# Altium PCB PCB_dense_experiment.PcbDoc
Units mil, origin at the board's own origin, x right, y up, seen from the top; angles counter-clockwise.
Board outline 4040 x 2825 mil, 2 copper layers (Top Layer, Bottom Layer); 68 components, 54 nets, 243 pads, 108 vias.
Unrouted connection lines stored in the file: 1.
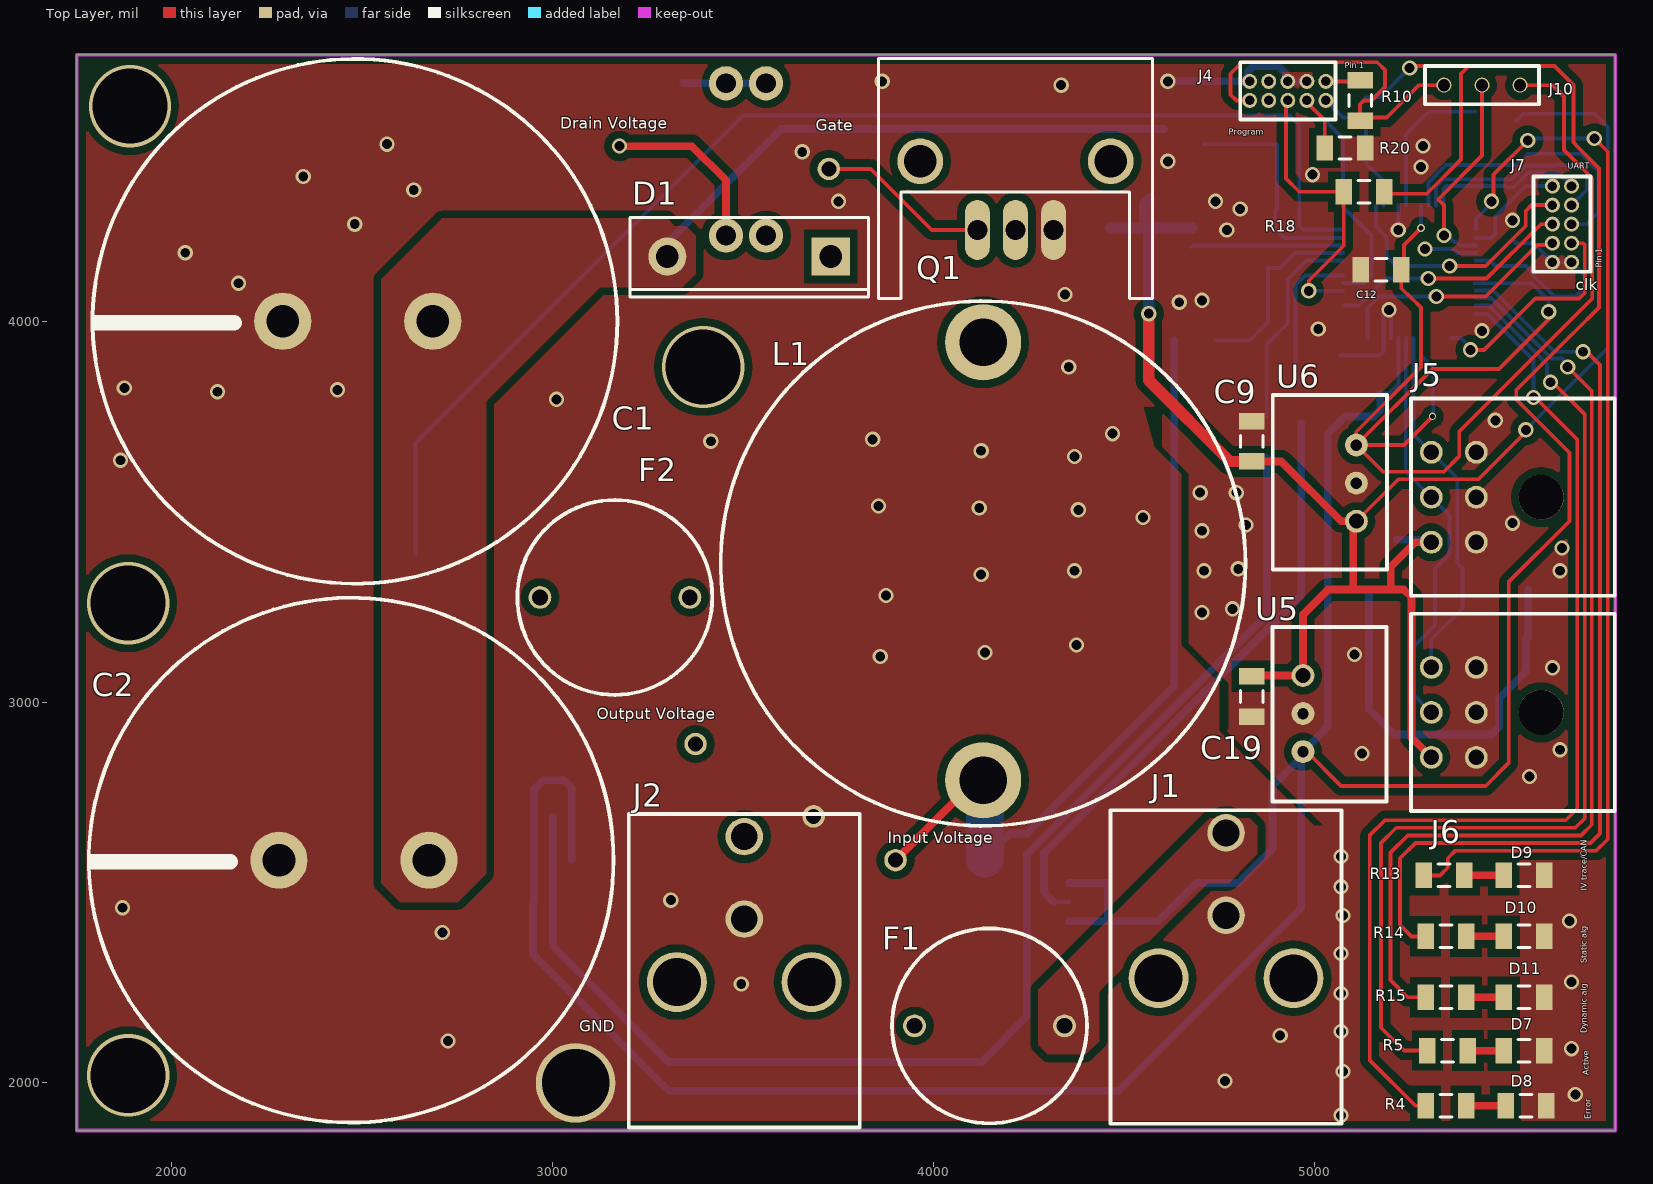
[diagram p0: Top Layer view]
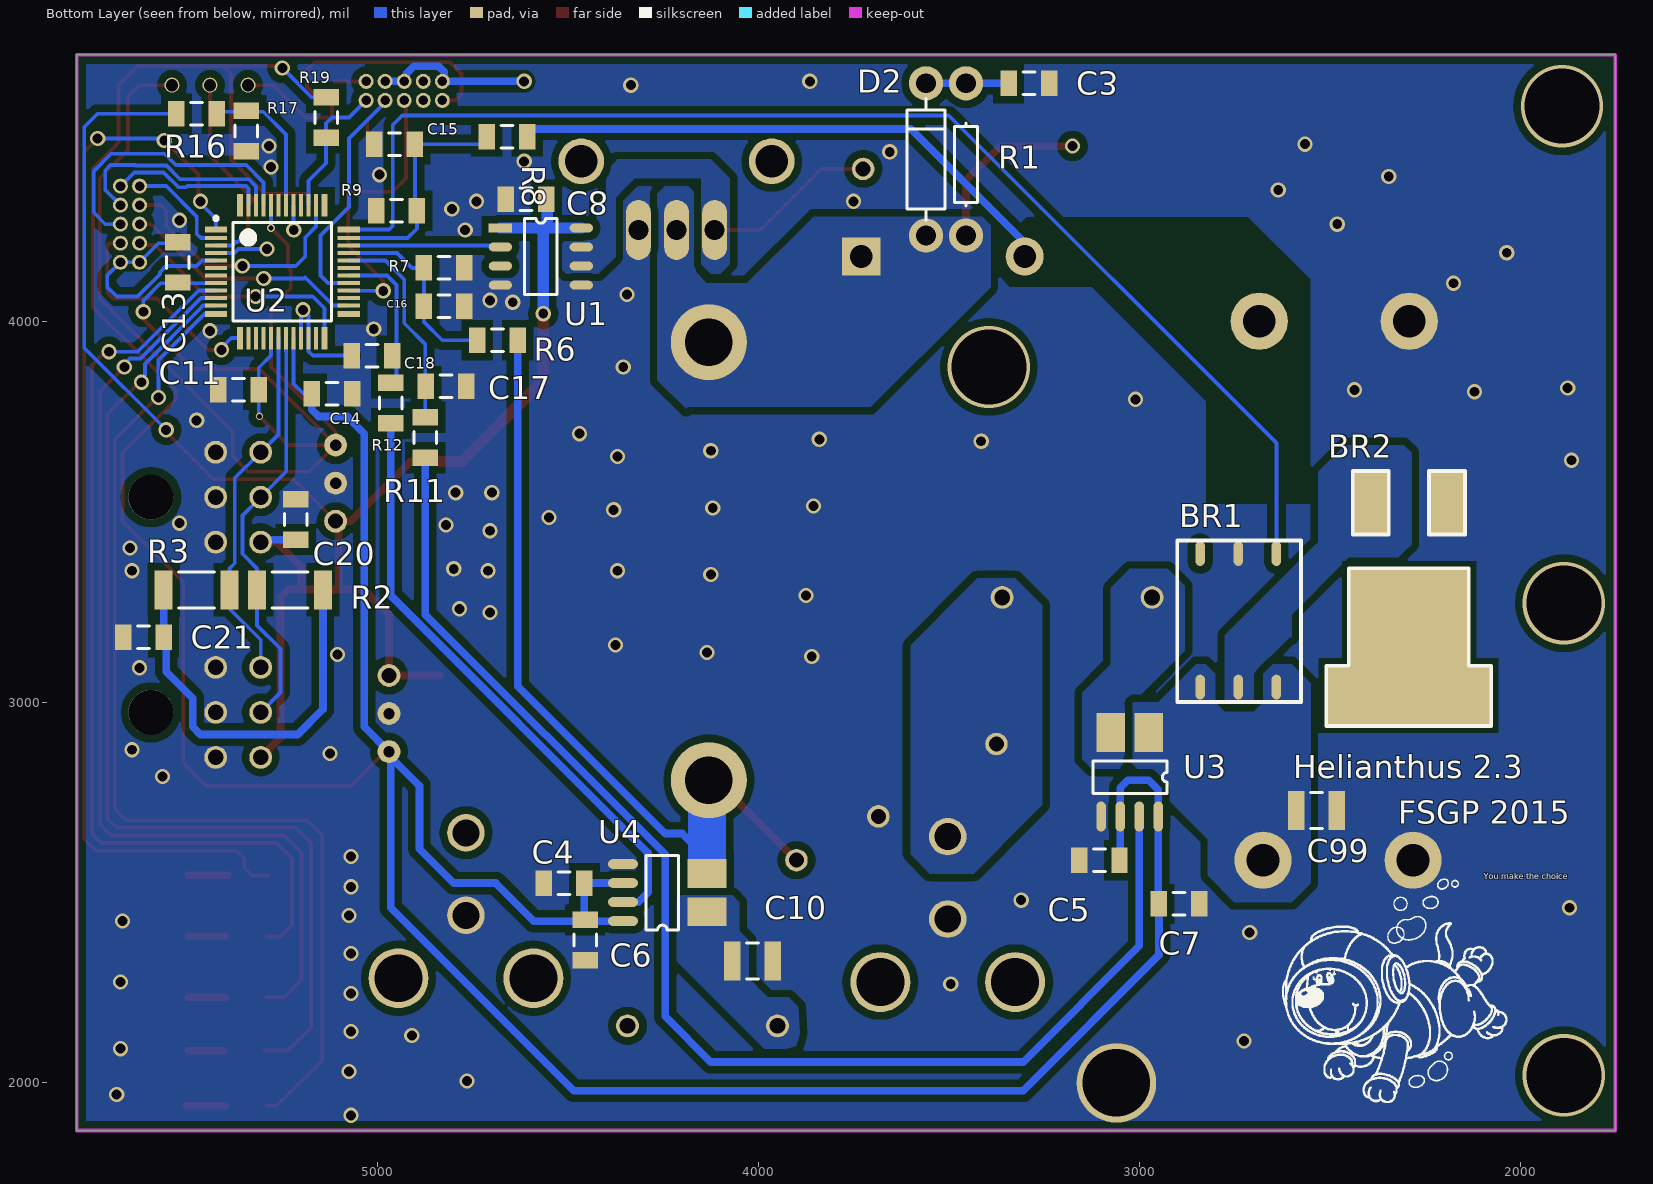
[diagram p1: Bottom Layer view, seen from below]

## Layer stack, top to bottom
Top Solder: solder mask 0.4, Solder Resist, Dk 3.5
Top Layer: signal copper 1.4
Dielectric 1: dielectric 12.6, FR-4, Dk 4.8
Bottom Layer: signal copper 1.4
Bottom Solder: solder mask 0.4, Solder Resist, Dk 3.5

## Board outline
1750,1875 1750,4700 5790,4700 5790,1875

## Design rules (kind name [scope] priority, off if disabled: settings)
Clearance "Polygon Clearance" [InPolygon] p1: gap=20
Clearance "All Clearance" [All] p2: gap=8
ComponentClearance "LPC11C24 clearance excuse" [InComponentClass('Microcontroller') vs InComponentClass('Microcontroller')] p1: gap=5 collisioncheckmode=3 verticalgap=10 showdistances=FALSE
DiffPairsRouting [All] p1: maxlimit=10 minlimit=10 mostfreqgap=10 toplayer_minwidth=10 toplayer_maxwidth=15 toplayer_prefwidth=15 bottomlayer_minwidth=10 bottomlayer_maxwidth=15 bottomlayer_prefwidth=15 maxuncoupledlength=500
PlaneConnect [All] p1: planeconnectstyle=Direct reliefexpansion=0 reliefentries=4 reliefconductorwidth=10 reliefairgap=0
PolygonConnect [All] p1: connectstyle=Direct reliefconductorwidth=10 reliefentries=4 polygonreliefangle="90 Angle" airgapwidth=0
RoutingVias [All] p1: holewidth=28 width=50 viastyle="Through Hole" minholewidth=11.81 minwidth=50 maxholewidth=28 maxwidth=50
SolderMaskExpansion [All] p1: expansion=4
UnpouredPolygon [All] p1: allowunpoured=FALSE
Width [All] p1: maxlimit=150 minlimit=4 preferedwidth=10 minimp=50.000000 maximp=50.000000 favimp=50.000000
26 further rules are at their usual default settings.

## Classes and differential pairs
component class Microcontroller: C11 C12 C13 C14 C15 C16 C17 C18 C21 D7 D8 D9 D10 D11 J4 J7 J10 R2 R3 R4 R5 R6 R7 R8 R9 R10 R11 R12 R13 R14 R15 R16 R17 R18 R19 R20 U2
component class System: BR1 BR2 C1 C2 C3 C4 C5 C6 C7 C8 C9 C10 C19 C20 C99 D1 D2 F1 F2 J1 J2 J5 J6 L1 Q1 R1 U1 U3 U4 U5 U6
differential pair CAN: +CAN_P -CAN_N

## Components (designator, comment, footprint, x,y, rotation, side; value= is the part's Value field where it differs from the comment)
BR1 "Bleeder Relay: CLA343-ND, Normally closed" "Bleeder Relay: CLA343-ND" 2835,3390 r270 bottom
BR2 "PWR263S-20-1001F-ND, 1K  20W" PWR263S-20-1001F-ND 2345,3440 r0 bottom
C1 "Cap 1000uF, 200V rated" LargeCap 2685,4000 r90 top
C2 "Cap 1000uF" LargeCap 2675,2585 r90 top
C3 "Cap Semi" C1206 3290,4625 r180 bottom
C4 "Cap Semi" C1206 4510,2525 r0 bottom
C5 "Cap Semi" C1206 3105,2585 r0 bottom
C6 "Cap Semi" C1206 4455,2375 r270 bottom
C7 "Cap Semi" C1206 2895,2470 r180 bottom
C8 "Cap Semi" C1206 4610,4320 r0 bottom
C9 "Cap Semi" C1206 4835,3685 r270 top
C10 "Cap Semi" C1210 4015,2320 r180 bottom
C11 "Cap Semi" C1206 5365,3820 r0 bottom
C12 "Cap Semi" C1206 5175,4135 r0 top
C13 "Cap Semi" C1206 5525,4155 r270 bottom
C14 "Cap Semi" C1206 5120,3810 r0 bottom
C15 "Cap Semi" C1206 4955,4465 r180 bottom
C16 "Cap Semi" C1206 4825,4040 r180 bottom
C17 "Cap Semi" C1206 4820,3830 r180 bottom
C18 "Cap Semi" C1206 5015,3910 r0 bottom
C19 "Cap Semi" C1206 4835,3015 r90 top
C20 "Cap Semi" C1206 5215,3480 r270 bottom
C21 "Cap Semi" C1206 5615,3170 r0 bottom
C99 "Cap Semi" C1210 2535,2715 r0 bottom
D1 "PowerDiode, 200V reverse" PowerDiode 3730,4170 r270 top
D2 "Diode 1N4003, 200V Rated" "Diode RDC" 3560,4225 r90 bottom
D7 "Green LED" C1206 5550,2085 r0 top
D8 "Red LED" C1206 5555,1940 r0 top
D9 "Yellow LED" C1206 5550,2545 r0 top
D10 "Blue LED" C1206 5550,2385 r0 top
D11 "Orange LED" C1206 5550,2225 r0 top
F1 "Fuse (Rating TBD)" Fuseholder 3950,2150 r180 top
F2 "Fuse (Rating TBD)" Fuseholder 3360,3275 r0 top
J1 "2 circuit MOLEX Receptacle, 9A rated" "2 circuit MOLEX Receptacle" 4945,2275 r0 top
J2 "2 circuit MOLEX Receptacle, 9A Rated" "2 circuit MOLEX Receptacle" 3680,2265 r0 top
J4 "10 pin SWD" "10 Pin JTAG/SWD" 5030,4630 r180 top
J5 "CAN 6 pin connector" "CAN 6 pin connector" 5425,3420 r180 top
J6 "CAN 6 pin connector" "CAN 6 pin connector" 5425,2855 r180 top
J7 "10 pin UART" "10 Pin JTAG/SWD" 5675,4155 r90 top
J10 "3-Pin Program Toggle" "3-Pin Program Toggle" 5290,4670 r0 top
L1 "1200 uH, 14.4 A rated" "Large Inductor" 4130,3945 r270 top
Q1 "FetWithHeatSink" FetWithHeatSink 4315,4240 r270 top
R1 "Res2" "RES RDC" 3455,4225 r270 bottom
R2 "Res3" 12Z-2010 5230,3295 r180 bottom
R3 "Res3" 12Z-2010 5475,3295 r180 bottom
R4 "Res3" C1206 5345,1940 r0 top
R5 "Res3" C1206 5350,2085 r0 top
R6 "Res3" C1206 4685,3950 r0 bottom
R7 "Res3" C1206 4825,4140 r180 bottom
R8 "Res3" C1206 4660,4485 r0 bottom
R9 "Res3" C1206 4950,4290 r180 bottom
R10 "Res3" C1206 5120,4580 r270 top
R11 "Res3" C1206 4875,3695 r90 bottom
R12 "Res3" C1206 4965,3785 r90 bottom
R13 "Res3" C1206 5340,2545 r0 top
R14 "Res3" C1206 5345,2385 r0 top
R15 "Res3" C1206 5345,2225 r0 top
R16 "Res3" C1206 5475,4545 r180 bottom
R17 "Res3" C1206 5345,4500 r90 bottom
R18 "Res3" C1206 5130,4340 r180 top
R19 "Res3" C1206 5135,4535 r270 bottom
R20 "Res3" C1206 5080,4455 r0 top
U1 "FET driver" "FET Driver" 4465,4245 r0 bottom
U2 "LPC11C24FBD48/301" SOT313-2_V 5250,4130 r180 bottom
U3 "Current sensor" "Current sensor" 2975,2920 r0 bottom
U4 "Current sensor, 20A max, 185mV/A" "Current sensor" 4135,2450 r90 bottom
U5 "12 to 5 converter, 0.5A max" "12 to 5 converter" 4970,3070 r270 top
U6 "12 to 3.3 converter, 0.5A max" "12 to 5 converter" 5110,3475 r90 top

## Footprints (in the part's own frame and the unit in brackets; to place one, negate y for a bottom-side part, rotate by r counter-clockwise, add the part's x,y. Pads: shape width x height; smd on the part's side, far side on the other; paste and mask are expansions set on the pad)
"2 circuit MOLEX Receptacle" [mm]
  round 2.5 hole 1.8: 1(-4.5,4.2) 2(-4.5,9.7)
  round 4 hole 3.2: 3(-9,0) 4(0,0)
  silkscreen extent -12.2,-9.7 3.2,11.2
"3-Pin Program Toggle" [mm]
  round 1 hole 0.813: 0(1.27,-1.27) 1(3.81,-1.27) 2(6.35,-1.27)
  silkscreen extent 0,-2.54 7.62,0
"10 Pin JTAG/SWD" [mm]
  round 1 hole 0.635: 1(0,0) 2(0,1.27) 3(1.27,0) 4(1.27,1.27) 5(2.54,0) 6(2.54,1.27) 7(3.81,0) 8(3.81,1.27) 9(5.08,0) 10(5.08,1.27)
  silkscreen extent -0.64,-1.27 5.71,2.54
"12 to 5 converter" [mil]
  round 60 hole 39.37: 1(0,0)
  round 60 hole 30: 2(100,0) 3(200,0)
  silkscreen extent -127,-80 331,219
12Z-2010 [mm] "Chip Resistor, Body 5.0x2.5mm, IPC High Density"
  rect 1.2x2.6 smd: 1(-2.2,0) 2(2.2,0)
  silkscreen extent -1.2,-1.2 1.2,1.2, body extent -2.58,-1.33 2.58,1.33, height 0.9
"Bleeder Relay: CLA343-ND" [mm]
  oval 1.65x0.64 smd: 1(0,4.953) 2(0,2.413) 3(0,-0.127) 4(8.9,4.953) 5(8.9,2.413) 6(8.9,-0.127)
  silkscreen extent -0.86,-1.65 9.91,6.6
C1206 [mm] "Chip Capacitor, Body 3.2x1.6mm, IPC High Density"
  rect 1.1x1.7 smd: 1(-1.35,0) 2(1.35,0)
  silkscreen extent -0.4,-0.75 0.4,0.75, body extent -1.7,-0.9 1.7,0.9, height 1.3
C1210 [mm] "Chip Capacitor, Body 3.2x2.5mm, IPC High Density"
  rect 1.1x2.6 smd: 1(-1.35,0) 2(1.35,0)
  silkscreen extent -0.4,-1.2 0.4,1.2, body extent -1.7,-1.35 1.7,1.35, height 1.3
"CAN 6 pin connector" [mm]
  round 1.524 hole 1.02: 1(0,0) 2(0,-3) 3(3,-3) 4(3,0) 5(0,-6) 6(3,-6)
  round 3 hole 3: 7(-4.32,-3)
  silkscreen extent -9.24,-9.57 4.36,3.57
"Current sensor" [mm]
  rect 1.905x2.6 smd: 1(0,0) 2(2.54,0)
  oval 0.65x2 smd: 3(3.175,5.6) 4(1.905,5.6) 5(0.635,5.6) 6(-0.635,5.6)
  silkscreen extent -1.22,1.9 3.73,4.05
"Diode RDC" [mil]
  round 90 hole 52: 1(0,0) 2(400,0)
  silkscreen extent 40,-50 360,50
"FET Driver" [mm]
  rect 1.55x0.6 smd: 1(5.4,0)
  oval 1.55x0.6 smd: 2(5.4,1.27) 3(5.4,2.54) 4(5.4,3.81) 5(0,3.81) 6(0,2.54) 7(0,1.27) 8(0,0)
  silkscreen extent 1.61,-0.64 3.79,4.44
FetWithHeatSink [mil]
  oval 157.48x65 hole 52: 1(0,-200) 2(0,-100) 3(0,0)
  round 120 hole 86: 4(-180,150) 4(-180,-350)
  silkscreen extent -450,-460 180,260
Fuseholder [mil]
  round 60 hole 41.34: 0(-393.7,0) 1(0,0)
  silkscreen extent -453,-256 59,256
"Large Inductor" [mil]
  round 200 hole 125: 1(0,0) 2(1150,0)
  silkscreen extent -108,-689 1270,689
LargeCap [mil]
  round 150 hole 86: 1(0,0) 2(0,394)
  silkscreen extent -689,-485 689,893
PowerDiode [mil]
  rect 100x100 hole 59.5: 1(0,0)
  round 100 hole 59.5: 3(0,-429.13)
  silkscreen extent -102,-528 106,98
PWR263S-20-1001F-ND [mm]
  rect 11x4.02 smd: 0(-1.325,10.75)
  rect 2.4x4.23 smd: 1(-3.9,-2.125) 2(1.2,-2.1)
  rect 8x6.5 smd: 3(-1.375,5.5)
  silkscreen extent -6.84,-4.23 4.16,12.77
"RES RDC" [mil]
  round 90 hole 52: 1(0,0) 2(-400,0)
  silkscreen extent -296,-30 -78,30
SOT313-2_V [mm] "Thin QFP, 48-Leads, Body 7x7mm, Pitch 0.5mm, NXP Recommended"
  rect 1.5x0.4 smd: 1(-4.425,2.81) 12(-4.425,-2.81) 25(4.425,-2.81) 36(4.425,2.81)
  rect 1.5x0.28 smd: 2(-4.425,2.25) 3(-4.425,1.75) 4(-4.425,1.25) 5(-4.425,0.75) 6(-4.425,0.25) 7(-4.425,-0.25) 8(-4.425,-0.75) 9(-4.425,-1.25) 10(-4.425,-1.75) 11(-4.425,-2.25) 26(4.425,-2.25) 27(4.425,-1.75) 28(4.425,-1.25) 29(4.425,-0.75) 30(4.425,-0.25) 31(4.425,0.25) 32(4.425,0.75) 33(4.425,1.25) 34(4.425,1.75) 35(4.425,2.25)
  rect 0.4x1.5 smd: 13(-2.81,-4.425) 24(2.81,-4.425) 37(2.81,4.425) 48(-2.81,4.425)
  rect 0.28x1.5 smd: 14(-2.25,-4.425) 15(-1.75,-4.425) 16(-1.25,-4.425) 17(-0.75,-4.425) 18(-0.25,-4.425) 19(0.25,-4.425) 20(0.75,-4.425) 21(1.25,-4.425) 22(1.75,-4.425) 23(2.25,-4.425) 38(2.25,4.425) 39(1.75,4.425) 40(1.25,4.425) 41(0.75,4.425) 42(0.25,4.425) 43(-0.25,4.425) 44(-0.75,4.425) 45(-1.25,4.425) 46(-1.75,4.425) 47(-2.25,4.425)
  silkscreen extent -4.55,-3.27 3.27,3.68, body extent -3.5,-3.5 3.5,3.5, height 1.6

## Part data
BR1: library part "Bleeder Relay: CLA343-ND"
BR2: library part PWR263S-20-1001F-ND
C1 C2: library part "Cap 1200uF"
C3 C4 C5 C6 C7 C8 C9 C10 C11 C12 C13 C14 C15 C16 C17 C18 C19 C20 C21 C99: "Capacitor (Semiconductor SIM Model)"
D1: library part PowerDiode
D2: library part "Diode 1N4003", "1 Amp General Purpose Rectifier"
D7 D8 D9 D10 D11: library part LED0, "Typical INFRARED GaAs LED"
F1 F2: library part Fuseholder
J1 J2: library part "2 circuit MOLEX Receptacle"
J4 J7: library part "10 pin JTAG"
L1: library part "Large inductor", "120 uH"
R1 R2 R3 R4 R5 R6 R7 R8 R9 R10 R11 R12 R13 R14 R15 R16 R17 R18 R19 R20: "Resistor"
U2: "32-bit ARM Cortex-M0 MCU, 32 kB Flash, 8 kB SRAM, CAN, CAN drivers on-chip, CAN Transceiver, 48-Pin LQFP"
U3: "This is the new current sensor 620-1262-1-ND"
U4: library part "Current sensor", "This is the new current sensor 620-1262-1-ND. Cap at filter pin determines the bandwidth of the device"
U5 U6: library part "12 to 5 converter"

## Free pads (board coordinates)
  round 59.06 hole 39.37: 0(3685,2700) 1(3725,4400) 2(3900,2585) 3(3375,2890)
  round 208.66 hole 177.17: 12(3060,2000)

## Via types
v1: diameter 40, hole 26, Top Layer to Bottom Layer, 102 vias
v2: diameter 216.54, hole 196.85, Top Layer to Bottom Layer, 4 vias
v3: diameter 21.65, hole 13.78, Top Layer to Bottom Layer, 1 vias
v4: diameter 19.68, hole 13.78, Top Layer to Bottom Layer, 1 vias

## Nets (pads, with @x,y where several pads share a name; then routed paths per layer and width w, separated by ;. In a path a pad name is that pad's centre, name@x,y a point inside that pad or via, vN(x,y) a via of type N, cw(c..) or ccw(c..) an arc to the next point about the centre after c; other vN are vias at no path point)
3.3V: C11.1 C12.2 C13.2 J10.2 U2.8 U2.17 U2.44 U6.3 | length 3660.5
  Top Layer w10: v3(5280,4245) 5235,4200 5235,4141.85 C12.2 5228.15,4086.85 5256,4059 5257.01,4059 5280,4036.01 5280,3880 5110,3710 U6.3 ; v4(5310,3750) 5235,3675 U6.3 ; J10.2 5625,4620 5655,4590 5655,4450 5729.51,4375.49 5729.51,4059.51 5380,3710 5380,3645 5340,3605 5180,3605 U6.3 ; v1(5615,4025) 5615,4005 5485,3875 5310,3875 U6.3
  Bottom Layer w10: U2.17 5279.53,3910.47 5311.85,3878.15 C11.1 v4@5311.85,3751.85 ; U2.44 5279.53,4245.47 v3(5280,4245) ; U2.8@5420,4100 5569.54,4100 5615,4054.54 v1(5615,4025)
"3.3V PROGRAMMING": J4.1 R10.1 | length 88.1
  Top Layer w10: J4.1@5025,4630 R10.1@5113.15,4630
5V: C4.1 C5.1 C6.1 C7.1 C14.2 R18.1 R19.1 U2.20 U3.4 U3.6 U4.4 U4.6 U5.3 | length 9543.2
  Top Layer w10: U5.3 4980,2870 5070,2780 5450,2780 5510,2840 5510,3315 5670,3475 5670,3655 5530,3795 5530,3820 5680,3970 5681,3970 5747.51,4036.51 5747.51,4401.48 5686,4462.99 5686,4464 5680,4470 5680,4620 5630,4670 5405,4670 ; R18.1@5183.15,4335 5295,4335 5385,4425 5385,4650 5405,4670 ; v1(5250,4665) 5255,4670 5405,4670
  Bottom Layer w10: R19.1 5173.15,4588.15 v1(5250,4665) ; C14.2 5195,3810 5220.47,3835.47 U2.20
  Bottom Layer w20: C5.1@3050,2586.85 U3.4 3050,2775 3030,2795 2975,2795 2950,2770 U3.6 2950,2471.85 C7.1 2948.15,2336.85 3305,1980 4485,1980 4965,2460 4965,2855 4890,2780 4890,2615 4800,2525 4690,2525 4590,2425 U4.6 ; U4.4 C4.1 C6.1@4456.85,2430 ; U5.3 5035,2935 5035,3705 5080,3750 5155,3750 5173.15,3768.15 C14.2
12V: C8.1 C9.2 C19.2 C20.2 J5.4 J6.4 R16.1 U1.1 U1.8 U5.1 U6.1 | length 4614.4
  Top Layer w10: U6.1 5220,3585 5430,3585 5552.5,3707.5 v1@5552.5,3717.5
  Top Layer w20: C9.2 4913.15,3631.85 5070,3475 U6.1 5101.57,3466.57 5101.57,3295.59 ; C19.2@4836.85,3070 U5.1 4970,3230 5035.59,3295.59 5101.57,3295.59 ; J6.4 5255,2906.89 5255,3275 5234.41,3295.59 5200,3295.59 ; J5.4 5265,3420 5200,3355 5200,3295.59 ; 5101.57,3295.59 5200,3295.59
  Top Layer w30: v1(4565,4020) 4565,3845 4778.15,3631.85 C9.2
  Bottom Layer w10: R16.1@5528.15,4525 5548.15,4545 5735,4545 5770,4510 5770,3930 v1(5555,3715)
  Bottom Layer w20: C20.2 5300.04,3426.85 J5.4
  Bottom Layer w30: U1.8 U1.1 ; 4555,4245 4555,4308.15 C8.1@4566.85,4320 ; v1(4565,4020) 4565,4245
12V_CURRENT: U2.40
12V_IN: R16.2 R17.2 U2.42 | length 392.4
  Bottom Layer w10: U2.42 5240.16,4490.16 5300,4550 R16.2@5421.85,4550
"BLUE LED": R14.1 U2.9 | length 2447.4
  Top Layer w10: R14.1 5255,2385 5225,2415 5225,2590 5265,2630 5725,2630 5750,2655 5750,3885 5710,3925 v1(5705,3920)
  Bottom Layer w10: U2.9 5469.49,4080.79 5502.74,4047.54 5502.74,4047.26 5630,3920 v1(5705,3920)
CAN_N: J5.6 J6.6 R3.2 U2.18 | length 954.9
  Top Layer w10: J6.6@5303.78,3091.22 J6.6
  Bottom Layer w10: U2.18 5259.84,3921.26 5260,3921.1 5260,3703.11 J5.6 5375,3588.11 5375,3365 5374.78,3364.78 5388.39,3351.18 R3.2 5388.39,3245.1 5306.89,3163.61 J6.6
CAN_P: J5.3 J6.3 R2.1 U2.19 | length 1093.3
  Bottom Layer w10: U2.19 5240.16,3921.26 5240,3921.1 5240,3605 J5.3 5355,3490 5355,3389.57 5316.61,3351.18 R2.1 5316.61,3201.61 5255,3140 5255,3025 J6.3
CLKOUT: U2.4 | length 138.7
  Bottom Layer w10: v1(5290,4190) 5365,4190 5375.79,4179.21 U2.4
DRAIN: D1.1 D2.1 L1.1 Q1.2 R1.1 | length 462.3
  Top Layer w20: v1(3175,4460) 3365,4460 3455,4370 R1.1
GATE: pad.1 Q1.1 U1.6 U1.7 | length 456.3
  Top Layer w10: pad.1 3835,4400 3995,4240 Q1.1
GND: BR1.2 BR2.1 C1.2 C2.2 C3.2 C4.2 C5.2 C6.2 C7.2 C8.2 C9.1 C10.2 C11.2 C12.1 C13.1 C14.1 C15.1 C16.2 C17.2 C18.2 C19.1 C20.1 C21.2 C99.1 D7.2 D8.2 D9.2 D10.2 D11.2 J1.1 J2.1 J4.3 J4.5 J4.9 J5.1 J5.2 J5.5 J6.1 J6.2 J6.5 J7.1 J7.2 pad.0 pad.12 Q1.3 R7.2 R9.1 R17.1 R20.2 U1.4 U1.5 U2.5 U2.21 U2.22 U2.41 U3.3 U4.3 U5.2 U6.2 | length 1382.8
  Bottom Layer w10: C18.2 5170,3910 5181.1,3921.1 U2.22 5181.1,4015.05 v1(5196.11,4030.06) 5200.79,4025.38 U2.21 ; v1(5220,4240) 5220.47,4240.47 U2.41 ; U2.5 5460.47,4159.53 5475,4145 5555.35,4145 5571.46,4128.89 5571.46,4123.54 5630,4065 5685,4065 5710,4090 5710,4120 J7.1 J7.2 5575,4205 5528.15,4205 C13.1
  Bottom Layer w20: v1(4615,4630) 4825,4630 4825,4655 4840,4670 4905,4670 4925,4650 4925,4630 J4.3@4975,4630
  other v1: 5070,1915 5685,1970 4765,2005 5075,2030 5675,2090 2725,2110 4910,2125 5070,2135 5070,2235 3495,2260 5675,2265 5070,2340 2710,2395 5670,2425 5075,2440 1870,2460 3310,2480 5070,2515 5070,2595 5565,2805 5125,2865 5645,2875 5625,3090 3860,3120 5105,3125 4135,3130 4375,3150 4705,3235 4785,3245 3875,3280 4125,3335 4370,3345 4710,3345 5645,3345 4800,3350 5650,3405 4705,3450 4820,3465 5520,3470 4550,3485 4380,3505 4120,3510 3855,3515 4700,3550 4795,3550 1865,3635 4370,3645 4125,3660 3415,3685 3840,3690 4470,3705 5475,3740 3010,3795 2120,3815 2435,3820 1875,3825 4355,3880 5440,3975 5010,3980 4645,4050 4705,4055 4345,4070 2175,4100 2035,4180 4770,4240 2480,4255 5520,4265 4805,4295 3750,4315 4740,4315 2635,4345 2345,4380 4995,4385 5280,4405 4615,4420 3655,4445 5285,4460 2565,4465 4335,4620 3865,4630
"GREEN LED": R5.1 U2.11 | length 2688.2
  Top Layer w10: R5.1 5235,2085 5175,2145 5175,2630 5215,2670 5685,2670 5710,2695 5710,3755 5620,3845 v1(5620,3840)
  Bottom Layer w10: U2.11 5457.95,4041.42 5466.74,4032.63 5466.74,4032.35 5611,3888.09 5611,3859 5620,3850 v1(5620,3840)
I_IN: C18.1 R12.2 U2.30 | length 399.3
  Bottom Layer w10: R12.2 4950,3853.15 4950,4095 4975.16,4120.16 U2.30
I_IN: R12.1 U4.5 | length 1587.3
  Bottom Layer w10: 4315,2475 U4.5
  Bottom Layer w20: 4315,2475 4290,2500 4290,2605 4965,3280 R12.1
I_OUT: C17.1 R11.2 U2.32 | length 550.9
  Bottom Layer w10: R11.2 4875,3940 4930,3995 4930,4110 4979.53,4159.53 U2.32
I_OUT: R11.1 U3.5 | length 3488.4
  Bottom Layer w20: U3.5 3000,2360 3305,2055 4125,2055 4245,2175 4245,2600 4875,3230 R11.1
JTAG_RESETX: J4.10 J10.0 R10.2 | length 948.8
  Top Layer w10: J4.10@4825,4580 4795,4580 4780,4595 4780,4650 4810,4680 5165,4680 5185,4660 ; R10.2 5120,4570 5130,4580 5150,4580 5185,4615 5185,4660 ; R10.2@5131.85,4535 5190,4535 5275,4620 J10.0 ; 5183.75,4661.25 5185,4660
JTAG_TCLK_SWCLKX: J4.4 R20.1 U2.29 | length 761.3
  Top Layer w10: J4.4@4975,4580 5026.85,4528.15 R20.1
  Bottom Layer w10: J4.4@4975,4580 5075,4480 5075,4300 5150,4225 5150,4120 5130.47,4100.47 U2.29
JTAG_TDO_SWOX: J4.6 R18.2 U2.28 | length 759.4
  Top Layer w10: J4.6@4925,4580 4925,4375 4960,4340 R18.2 5076.85,4198.15 4985,4106.3 v1(4985,4080)
  Bottom Layer w10: v1(4985,4080) U2.28@5075,4080
JTAG_TMS_SWDIOX: J4.2 R19.2 U2.39 | length 369.7
  Bottom Layer w10: J4.2@5025,4580 J4.2 5075,4535 5120,4535 5135,4520 R19.2 5135,4415 5181.1,4368.9 U2.39
NetBR1_5: BR1.5 BR2.2
NetC3_1: C3.1 D2.2 R1.2 | length 216.8
  Bottom Layer w20: C3.1 R1.2 D2.2
NetC10_1: C10.1 F1.1 U4.1
NetC21_1: C21.1 R2.2 R3.1 | length 1082.6
  Bottom Layer w20: R2.2 5143.39,2981.61 5210,2915 5465,2915 5485,2935 5485,3010 5555,3080 5555,3163.62 5561.61,3170.24 R3.1
NetD7_1: D7.1 R5.2 | length 93.7
  Top Layer w20: R5.2 D7.1
NetD8_1: D8.1 R4.2 | length 103.7
  Top Layer w20: R4.2 D8.1
NetD9_1: D9.1 R13.2 | length 103.7
  Top Layer w20: R13.2 D9.1
NetD10_1: D10.1 R14.2 | length 98.7
  Top Layer w20: R14.2 D10.1
NetD11_1: D11.1 R15.2 | length 98.7
  Top Layer w20: R15.2 D11.1
NetF1_0: F1.0 J1.2
NetF2_0: F2.0 U3.2
NetF2_1: F2.1 J2.2 pad.3
NetJ10_1: J10.1 U2.3 | length 562.2
  Top Layer w10: v1(5340,4225) 5340,4305 5325,4320 5440,4435 J10.1
  Bottom Layer w10: v1(5340,4225) 5335,4230 5340,4235 5367,4208 5372.46,4208 5381.56,4198.9 U2.3
"NO CONNECT": Q1.4
"NO CONNECT2": U1.3
"ORANGE LED": R15.1 U2.10 | length 2552
  Top Layer w10: R15.1 5245,2225 5200,2270 5200,2605 5245,2650 5700,2650 5728,2678 5728,3817 v1(5665,3880)
  Bottom Layer w10: U2.10 5463.72,4061.1 5484.74,4040.08 5484.74,4039.8 5622.54,3902 5650.2,3902 5665,3887.2 v1(5665,3880)
PWM: U1.2 U2.34 | length 399.8
  Bottom Layer w10: U1.2 4681.5,4198.9 U2.34
"RED LED": R4.1 U2.12 | length 2790.5
  Top Layer w10: R4.1 5265,1940 5145,2060 5145,2650 5185,2690 5660,2690 5690,2720 5690,3690 5580,3800 v1(5575,3800)
  Bottom Layer w10: U2.12 5454.26,4019.37 5575,3898.63 v1(5575,3800)
RELAY_CTRL: BR1.1 U2.36 | length 3361.2
  Bottom Layer w10: BR1.1 2640,3680 3500,4540 4935,4540 4960,4515 4960,4250 4969.37,4240.63 U2.36
UART_CTS: J7.4 U2.24 | length 632.8
  Top Layer w10: v1(5320,4065) 5450,4065 5585,4200 J7.4@5625,4200
  Bottom Layer w10: U2.24 5139.37,4034.37 5170,4065 v1(5320,4065)
UART_DCD: J7.6 U2.26 | length 640.2
  Top Layer w10: v1(5299.12,4112) 5341.33,4112 5452,4112 5595,4255 J7.6
  Bottom Layer w10: U2.26 5116.42,4041.42 5190,4115 5193,4112 v1(5299.12,4112)
UART_DSR: J7.3 U2.13 | length 589.3
  Top Layer w10: v1(5410,3925) 5445,3925 5580,4060 5695,4060 5710,4075 5710,4200 5705,4205 J7.3
  Bottom Layer w10: U2.13 5384.21,3955.79 5410,3930 v1(5410,3925)
UART_DTR: J7.10 U2.2 | length 283.7
  Bottom Layer w10: U2.2 5463.58,4218.58 5475,4230 5475,4275 5555,4355 J7.10
UART_RI: J7.8 U2.38 | length 681.1
  Top Layer w10: v1(5355,4145) 5450,4145 5555,4250 5555,4290 5570,4305 J7.8
  Bottom Layer w10: U2.38 5161.42,4248.58 5190,4220 5190,4170 5215,4145 v1(5355,4145)
UART_RTS: J7.5 U2.45 | length 748.2
  Bottom Layer w10: U2.45 5299.21,4364.21 5345,4410 5530,4410 5560,4440 5700,4440 5745,4395 5745,4285 5715,4255 J7.5
UART_RXD: J7.7 U2.46 | length 582.7
  Bottom Layer w10: U2.46 5318.9,4354.35 5337.54,4373 5518.46,4373 5554.46,4409 5636.12,4409 5637.12,4410 5701,4410 5715,4396 5715,4345 J7.7
UART_TXD: J7.9 U2.47 | length 415.5
  Bottom Layer w10: U2.47 5338.58,4348.13 5345.46,4355 5499.34,4355 5502.34,4352 5522.91,4352 5561.91,4391 5639,4391 J7.9
V_IN: L1.2 pad.2 R6.1 U4.2 | length 2116.2
  Top Layer w20: pad.2 4110,2795 L1.2
  Bottom Layer w20: 4135,2590 4200,2655 4245,2655 4631.85,3041.85 R6.1
  Bottom Layer w100: L1.2 4135,2790 4135,2590
V_IN: C16.1 R6.2 R7.1 U2.33 | length 515.7
  Bottom Layer w10: R6.2 4830,3950 4878.15,3998.15 C16.1 R7.1 4910,4140 4949.21,4179.21 U2.33
V_OUT: BR1.4 BR1.6 C1.1 C2.1 C99.2 D1.3 R8.1 U3.1 | length 1463.9
  Bottom Layer w20: D1.3 3300.87,4205.87 3600,4505 R8.1@4605,4505
V_OUT: C15.2 R8.2 R9.2 U2.35 | length 604.9
  Bottom Layer w10: R8.2@4710,4465 C15.2 4901.85,4295 R9.2 4896.85,4243.15 4921.42,4218.58 U2.35
"YELLOW LED": R13.1 U2.1 | length 2857.3
  Top Layer w10: R13.1 5330,2545 5350,2565 5350,2590 5370,2610 5740,2610 5770,2640 5770,4445 v1(5735,4480) ; v1@5470,4315 5470,4385 v1(5560,4475)
  Bottom Layer w10: U2.1 5424.21,4269.21 5465,4310 v1(5465,4315) ; v1(5560,4475) 5565,4480 v1(5735,4480)
pads on no net: BR1.3 BR2.0 BR2.3 J1.3 J1.4 J2.3 J2.4 J4.7 J4.8 J5.7 J6.7 U2.6 U2.7 U2.14 U2.15 U2.16 U2.23 U2.25 U2.27 U2.31 U2.37 U2.43 U2.48
copper on no net:
  other v2: 1885,2020 1885,3260 3395,3880 1890,4565

## Polygon pours and split planes (outlines as drawn)
GND on Top Layer "NetC1_1_TopLayer" (solid, pour order 26): 1755,4695 5785,4695 5785,1880 1755,1880
V_OUT on Top Layer "NetC1_1_TopLayer" (solid, pour order 17): 3300,4270 3320,4250 3350,4250 3375,4225 3375,4125 3350,4100 3340,4090 3155,4090 3125,4090 2840,3805 2825,3790 2825,2555 2825,2550 2750,2475 2600,2475 2550,2525 2550,3050 2550,4110 2710,4270 3300,4270
NetF1_0 on Top Layer "NetC1_1_TopLayer" (solid, pour order 16): 4725,2695 4825,2695 4830,2695 4850,2675 4850,2600 4825,2575 4775,2525 4725,2525 4720,2525 4455,2260 4435,2240 4435,2115 4435,2110 4400,2075 4300,2075 4275,2100 4275,2175 4275,2245 4730,2700
GND on Bottom Layer "NetC1_1_TopLayer" (solid, pour order 25): 1755,4695 5785,4695 5790,4690 5790,1875 1755,1875
GATE on Bottom Layer "NetC1_1_TopLayer" (solid, pour order 19): 4500,4220 4515,4205 4515,4200 4515,4135 4505,4125 4420,4125 4375,4170 4375,4325 4350,4350 4325,4375 4300,4375 4150,4375 4150,4150 4125,4125 4100,4125 4075,4150 4075,4375 4100,4400 4125,4425 4150,4425 4370,4425 4375,4420 4400,4395 4400,4350 4400,4335 4425,4310 4425,4225 4430,4220 4500,4220
NetC10_1 on Bottom Layer "NetC1_1_TopLayer" (solid, pour order 15): 3925,2090 3985,2090 4005,2110 4215,2320 4215,2445 4215,2480 4195,2500 4075,2500 4050,2475 4050,2400 4025,2375 4025,2275 3975,2225 3925,2225 3920,2225 3895,2200 3891.37,2127.37 3898.99,2101.41 3902.57,2096.41
V_OUT on Bottom Layer "NetC1_1_TopLayer" (solid, pour order 20): 2625,3100 2650,3100 2675,3075 2675,3000 2700,2975 2775,2975 2800,3000 2800,3075 2825,3100 2850,3100 2875,3075 2950,3000 3010,3000 3015,3000 3025,2990 3025,2855 3025,2845 2825,2645 2820,2640 2820,2555 2820,2545 2750,2475 2600,2475 2550,2525 2550,3025 2550,3050 2600,3100
NetBR1_5 on Bottom Layer "NetC1_1_TopLayer" (solid, pour order 21): 2700,3075 2700,3000 2700,2995 2705,2990 2710,2985 2760,2985 2775,3000 2775,3105 2775,3175 2540,3410 2530,3420 2530,3595 2530,3605 2460,3675 2310,3675 2305,3675 2285,3655 2285,3415 2305,3395 2320,3380 2450,3380 2600,3230 2600,3170 2605,3170 2700,3075
NetF2_0 on Bottom Layer "NetC1_1_TopLayer" (solid, pour order 22): 3015,3000 2880,3135 2880,3290 2880,3305 2925,3350 3025,3350 3050,3325 3075,3300 3075,3125 3075,3100 3150,3025 3150,2875 3150,2850 3125,2825 3050,2825 3050,2830 3015,2865
NetF2_1 on Bottom Layer "NetC1_1_TopLayer" (solid, pour order 23): 3325,3325 3400,3325 3425,3325 3450,3300 3600,3150 3600,2640 3600,2600 3550,2550 3450,2550 3435,2550 3290,2695 3255,2730 3255,3245 3255,3255 3325,3325
DRAIN on Bottom Layer "NetC1_1_TopLayer" (solid, pour order 24): 3400,4275 3830,4275 3855,4275 4025,4105 4030,4100 4125,4100 4135,4100 4165,4130 4165,4315 4165,4335 4185,4355 4240,4355 4245,4355 4260,4340 4265,4335 4265,4105 4265,3845 4190,3770 4185,3775 3720,3775 3705,3775 3440,4040 3390,4090 3390,4230 3390,4265 3400,4275

## Keep-outs
Keep-Out Layer:
  the board outline again, w10

## Other copper
Top Layer:
  pour cut-out: 4550,3775 4600,3775 4600,3670 4670,3600 4670,3155 4775,3050 4775,2930 4770,2925 4820,2875 4825,2875 5025,2675 5000,2675 4750,2925 4750,3050 4650,3150 4650,3600 4580,3670
Bottom Layer:
  pour cut-out: 2550,3520 2550,4110 2715,4275 3295,4275 3320,4250 3350,4250 3375,4225 3375,4125 3340,4090 3125,4090 2825,3790 2825,3520

## Silkscreen, mask and mechanical layers (free items; w line width, h text height)
Top Overlay:
  text "Pin 1" at 5080,4665 h15
  text "Drain Voltage" at 3020,4505 h30
  text "Gate" at 3690,4500 h30
  text "Program" at 4775,4490 h15
  text "UART" at 5665,4400 h15
  text "Pin 1" at 5755,4140 h15 r90
  text "clk" at 5685.99,4081.7 h30
  text "Output Voltage" at 3115,2955 h30
  text "Input Voltage" at 3880,2630 h30
  text "IV trace/CAN" at 5715,2505 h15 r90
  text "Static alg" at 5715,2315 h15 r90
  text "GND" at 3070,2135 h30
  text "Dynamic alg" at 5715,2130 h15 r90
  text "Active" at 5720,2020 h15 r90
  text "Error" at 5725,1905 h15 r90
Bottom Overlay:
  drawing of 5607 lines, arcs and shapes, not listed
  text "Helianthus 2.3" at 2595,2800 h60
  text "FSGP 2015" at 2320,2680 h60
  text "You make the choice" at 2095,2535 h15